# EAGLE board PSLVCommutationRobot (EAGLE 6.3)
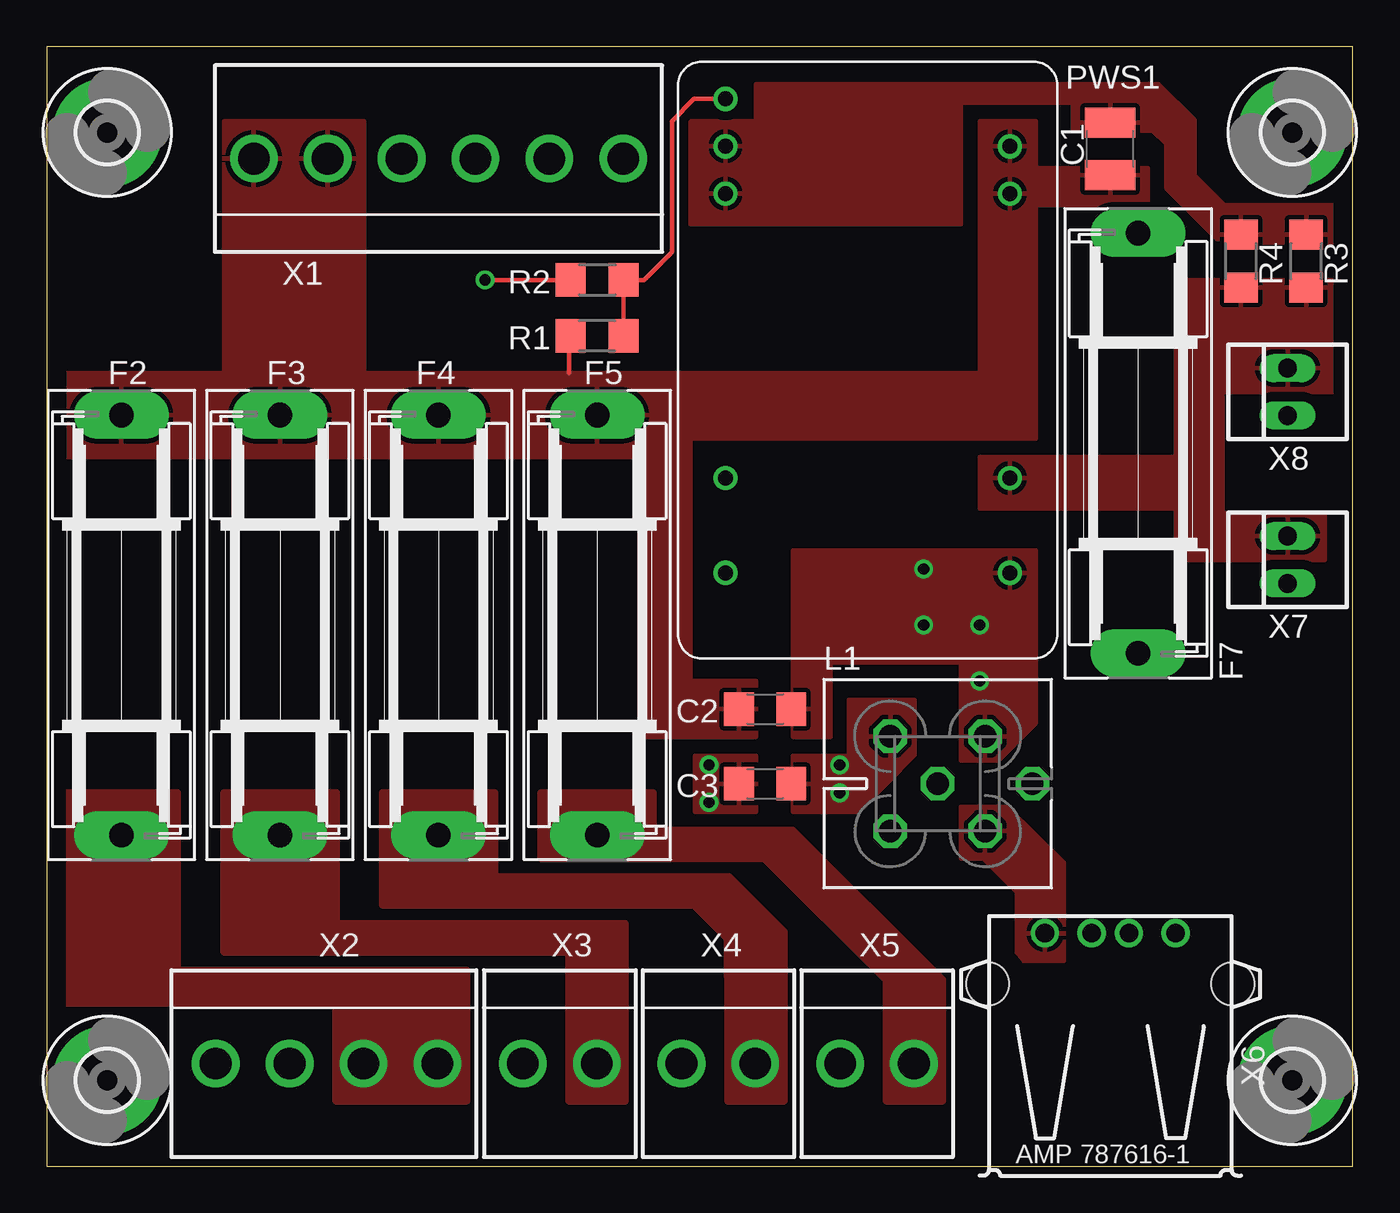
[diagram p0: board, top side]
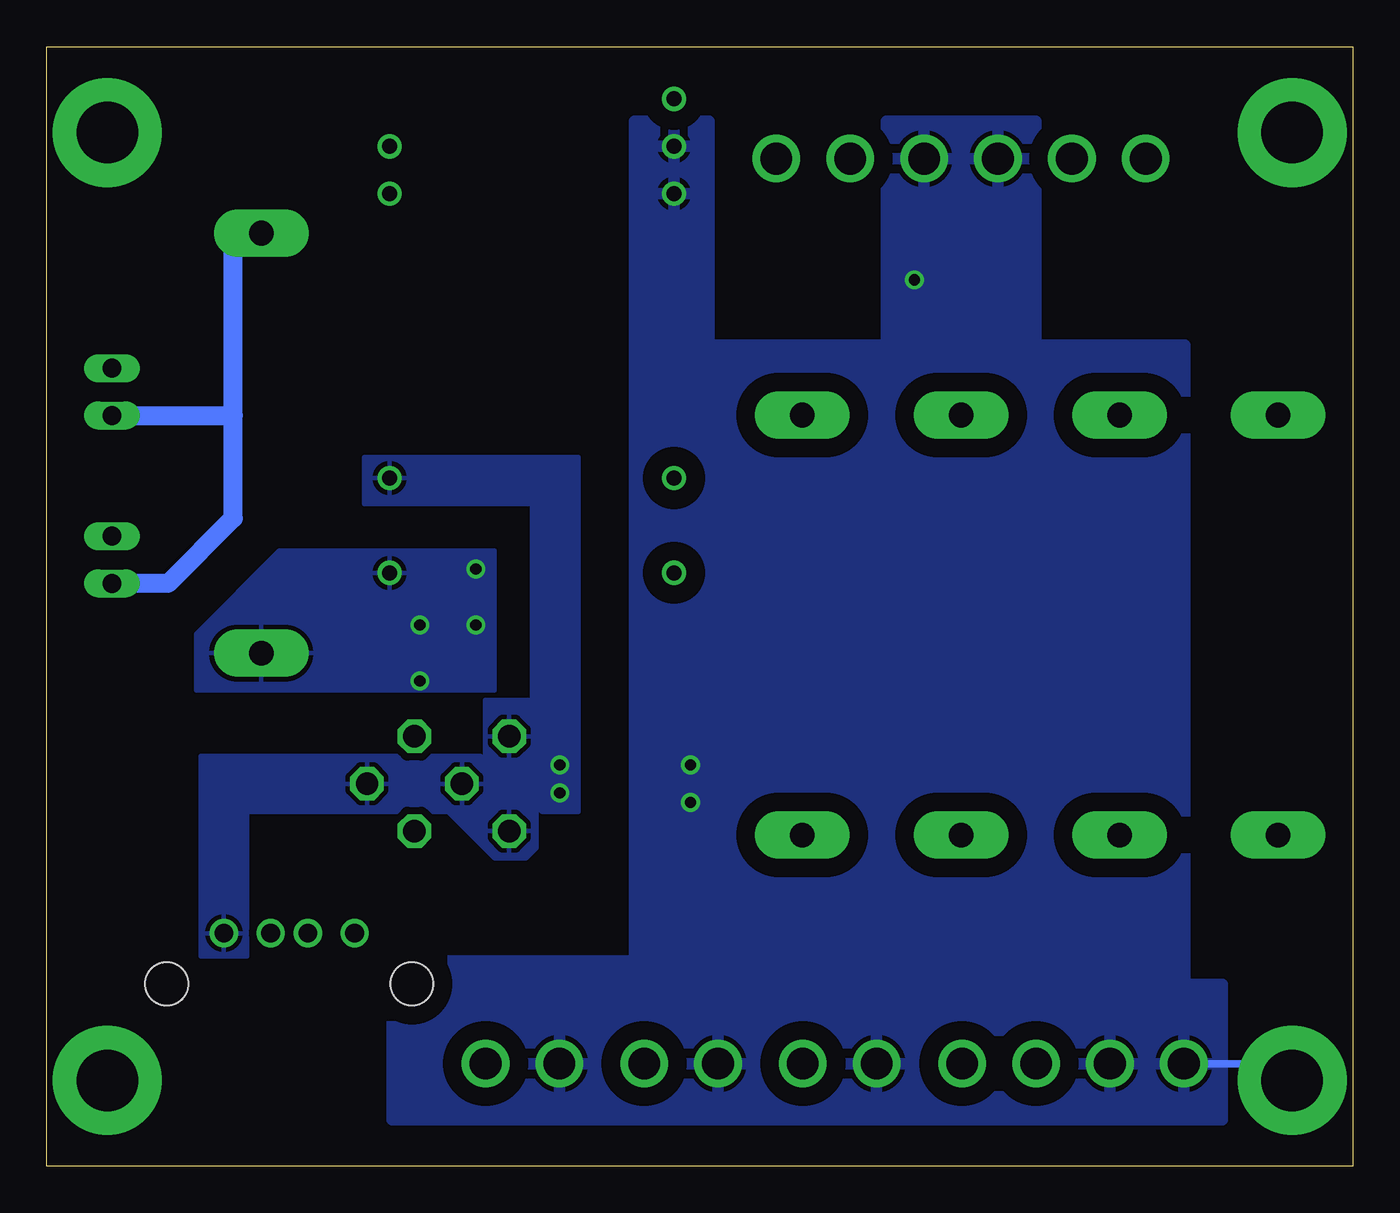
[diagram p1: board, bottom side, seen from below]

Size 70 x 60 mm. Coordinates in mm from the lower left corner, seen from the top.
Outline: 0,0 70,0 70,60 0,60 0,0
Copper layers (1*16): Top 0.035mm / dielectric 1.5mm / Bottom 0.035mm
Design rules "default *": minimum track width 10mil, minimum drill 24mil, track to track 8mil, track to pad 8mil, pad to pad 8mil, via to via 8mil, smd to smd 8mil, copper to edge 40mil, drill to drill 8mil, minimum pad ring 10mil, minimum via ring 8mil, stop-mask expansion 4mil, vias tented up to drill 0.6mm, thermal gap 10mil

## Footprints (pad centres in the part's own frame; a part is rotated, then mirrored left to right if it is on the bottom)
C1210 = smd 1.6 x 2.7: 1 -1.4,0; 2 1.4,0
C1206 = smd 1.6 x 1.8: 1 -1.4,0; 2 1.4,0
SH22,5 = drill 1.321 pad 2.54 long: 1 -11.252,0; 2 11.252,0
3,3-PAD = drill 3.3 pad 5.842: B3,3 0,0
BNX002 = drill 1.194 octagon: B 2.54,2.54; CB 2.54,-2.54; CG -2.54,-2.54; CG1 0,0; CG2 5.08,0; PSG -2.54,2.54
TRACO_TEN_8_SERIE = drill 0.8: 1 -7.62,12.7; 2 -7.62,10.16; 3 -7.62,7.62; 9 -7.62,-7.62; 11 -7.62,-12.7; 14 7.62,-12.7; 16 7.62,-7.62; 22 7.62,7.62; 23 7.62,10.16
R1206 = smd 1.6 x 1.803: 1 -1.422,0; 2 1.422,0
MOLEX_09-65-2068 = drill 1.7 pad 2.5: 1 -9.9,0; 2 -5.94,0; 3 -1.98,0; 4 1.98,0; 5 5.94,0; 6 9.9,0
MOLEX_09-65-2048 = drill 1.7 pad 2.5: 1 -5.94,0; 2 -1.98,0; 3 1.98,0; 4 5.94,0
MOLEX_09-65-2028 = drill 1.7 pad 2.5: 1 -1.98,0; 2 1.98,0
USB = drill 1: 1 -3.5,12.99; 2 -1,12.99; 3 1,12.99; 4 3.5,12.99 | hole 2.3: -6.57,10.28; 6.57,10.28
22-23-2021 = drill 1 long: 1 -1.27,0; 2 1.27,0

## Placement (x,y rotation side)
C1  1uF 50V  [C1210]  57,54.52 90 top
C2  1nF 2KV  [C1206]  38.5,24.5 0 top
C3  1nF 2KV  [C1206]  38.5,20.5 0 top
F2  FH-102  [SH22,5]  4,29 270 top
F3  FH-102  [SH22,5]  12.5,29 270 top
F4  FH-102  [SH22,5]  21,29 270 top
F5  FH-102  [SH22,5]  29.5,29 270 top
F7  [SH22,5]  58.5,38.75 90 top
H1  MOUNT-PAD-ROUND3.3  [3,3-PAD]  66.75,55.4 0 top
H2  MOUNT-PAD-ROUND3.3  [3,3-PAD]  3.25,55.4 0 top
H3  MOUNT-PAD-ROUND3.3  [3,3-PAD]  66.75,4.6 0 top
H4  MOUNT-PAD-ROUND3.3  [3,3-PAD]  3.25,4.6 0 top
L1  BNX002  [BNX002]  47.75,20.5 0 top
PWS1  TEN_8-2411  [TRACO_TEN_8_SERIE]  44,44.5 0 top
R1  1M 5%  [R1206]  29.5,44.5 0 top
R2  1M 5%  [R1206]  29.5,47.5 180 top
R3  0R  [R1206]  67.5,48.5 270 top
R4  0R  [R1206]  64,48.5 270 top
X1  09-65-2068  [MOLEX_09-65-2068]  21,54 0 top
X2  09-65-2048  [MOLEX_09-65-2048]  15,5.5 180 top
X3  09-65-2028  [MOLEX_09-65-2028]  27.5,5.5 180 top
X4  09-65-2028  [MOLEX_09-65-2028]  36,5.5 180 top
X5  09-65-2028  [MOLEX_09-65-2028]  44.5,5.5 180 top
X6  USB type A  [USB]  57,-0.5 0 top
X7  22-23-2021  [22-23-2021]  66.5,32.5 90 top
X8  22-23-2021  [22-23-2021]  66.5,41.5 90 top

## Library data of the parts
C1-C3 R1-R4 = rcl
F2-F5 F7 = fuse; MF: SCHURTER; MPN: 0031.8201; OC_FARNELL: 1162740; OC_NEWARK: 96F8317
H1-H4 = holes
L1 PWS1 X1-X5 = my_components
X6 = con-amp
X7 X8 = con-molex; MF: MOLEX; MPN: 22-23-2021; OC_FARNELL: 1462926; OC_NEWARK: 25C3832

## Nets
+5V: L1.CB X6.1
+5V_OUT: C2.2 F7.1 L1.B PWS1.14
+24V_IN: C1.1 C2.1 F2.1 F3.1 F4.1 F5.1 PWS1.22 PWS1.23 R1.1 X1.1 X1.2
GND: C1.2 C3.1 H4.B3,3 PWS1.2 PWS1.3 R2.2 R3.1 R4.1 X1.3 X1.4 X2.3 X2.4 X3.2 X4.2 X5.2
GND1: L1.CG L1.CG1 L1.CG2 X6.4
GND_OUT: C3.2 L1.PSG PWS1.16 R3.2 R4.2 X7.2 X8.2
N$1: PWS1.1 R1.2 R2.1
N$2: F2.2 X2.1 X2.2
N$3: F3.2 X3.1
N$4: F7.2 X7.1 X8.1
N$5: F5.2 X5.1
N$6: F4.2 X4.1

## Tracks (layer width: path | path; a pad name or v marks a point on that pad's centre or on a via)
+5V
  pour Top (isolate 0.4): 52,11 54.5,11 54.5,16.25 51.45,19.25 49,19.25 49,16.5 50.2,16.5 52,14.7
+5V_OUT  (via drill 0.6)
  other vias: 47,32 47,29 50,29 50,26
  pour Bottom (isolate 0.5): 46,33 46,25.5 62,25.5 62,28.53 57.53,33
  pour Top: 40,33 40,23 42,23 42,27 49,27 49,21.75 51,21.75 53,23.75 53,33
+24V_IN
  Top 0.254: R1.1 28,44.92 28,42.5
  pour Top: 9.5,56 17,56 17,42.5 34.5,42.5 34.5,26 38,26 38,23 32,23 32,38 1,38 1,42.5 9.5,42.5
  pour Top (isolate 0.406): 59,53.5 53,53.5 53,56 50,56 50,42.5 33.5,42.5 33.5,39 53,39 53,51.5 59,51.5
GND  (via drill 0.6)
  Top 0.254: R2.2 v23.5,47.5
  Bottom 0.406: H4.B3,3 4.15,5.5 X2.4
  other vias: 35.5,21.5 35.5,19.5
  pour Bottom (isolate 1): 17,56 25,56 25,44 34.5,44 34.5,56 38.5,56 38.5,11 51.5,11 51.5,2.5 7,2.5 7,9.75 9,9.75 9,44 17,44
  pour Top (isolate 0.5): 34.5,56 34.5,50.5 49,50.5 49,57 55,57 55,55.5 59.29,55.5 60,54.79 60,52.42 62.92,49.5 69,49.5 69,51.5 63.12,51.5 61.5,53.12 61.5,56.09 59.59,58 38,58 38,56
  pour Top: 34.75,22 34.75,19 38,19 38,22
GND1
  pour Bottom (isolate 0.4): 46.75,22 43.75,19 43.75,17.06 44.31,16.5 46,16.5 48.5,19 59.25,19 59.25,11.25 61.75,11.25 61.75,22
GND_OUT  (via drill 0.6)
  other vias: 42.5,21.5 42.5,20
  pour Bottom: 46.5,25 46.5,22.05 43.45,19 41.5,19 41.5,38 53,38 53,35.5 44,35.5 44,25
  pour Top: 40,22 40,19 43.5,19 46.5,22.05 46.5,25 43,25 43,22
  pour Top (isolate 0.5): 60.5,47.5 60.5,38 50,38 50,35.25 60.5,35.25 60.5,32.5 68.5,32.5 68.5,35 63,35 63,41.5 69.5,41.5 69.5,47.5
N$1
  Top 0.254: PWS1.1 34.7,57.2 33.5,56 33.5,49 32,47.5 R2.1 R1.2
N$2
  pour Top (no thermals): 0.5,20 0.5,8.75 15.5,8.75 15.5,3.5 22.5,3.5 22.5,10.5 7,10.5 7,20
N$3
  pour Top (no thermals): 9.5,20 15.5,20 15.5,13 31,13 31,3.5 28,3.5 28,11.5 9.5,11.5
N$4
  Bottom 1.016: 60,40.23 60,34.73 63.5,31.23 X7.1 | 60,40.23 60,50 F7.2 | X8.1 60,40.23
N$5
  pour Top (no thermals): 26.5,20 32.5,20 32.5,18 39.96,18 48,10 48,3.5 45,3.5 45,10 38.46,16.5 26.5,16.5
N$6
  pour Top (no thermals): 18,20 24,20 24,15.5 36.57,15.5 39.5,12.57 39.5,3.5 36.5,3.5 36.5,7.98 36.49,12.22 34.7,14 18,14

## Text on the board
Reference: Внимание: при монтаже выводных компонентов / методом волновой пайки - наклеить защитную / плёнку в указанных местах.